# Altium PCB BRAWN.PcbDoc
Units mm, origin at the board's own origin, x right, y up, seen from the top; angles counter-clockwise.
Board outline 20 x 15 mm, 4 copper layers (Top Layer, Layer 1, Layer 2, Bottom Layer), stack 1.868 mm thick; 41 components, 25 nets, 140 pads, 112 vias.
Unrouted connection lines stored in the file: 7.
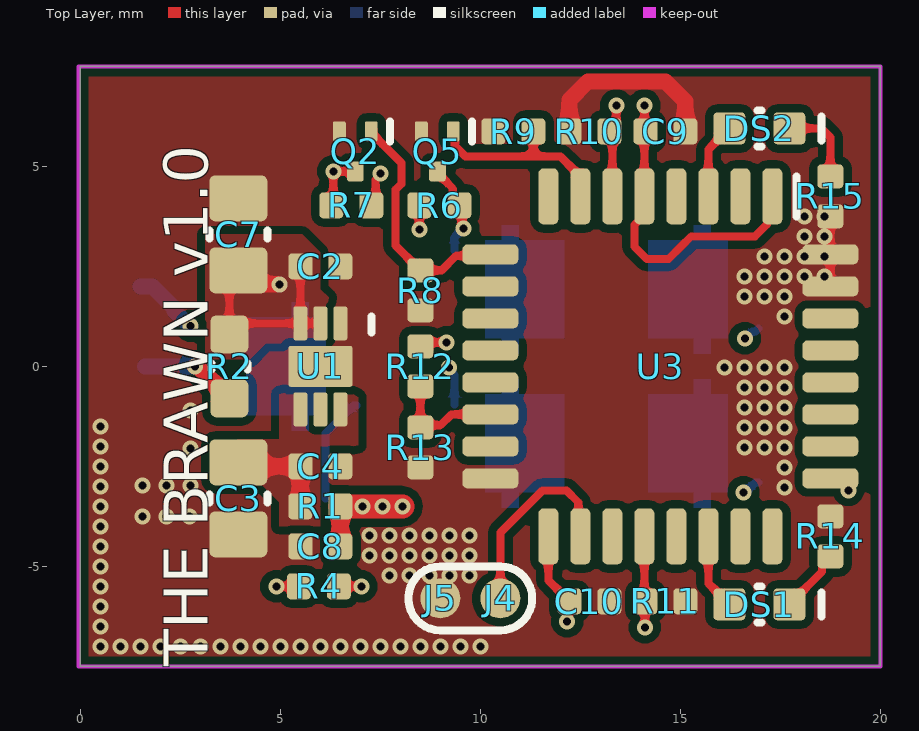
[diagram p0: Top Layer view]
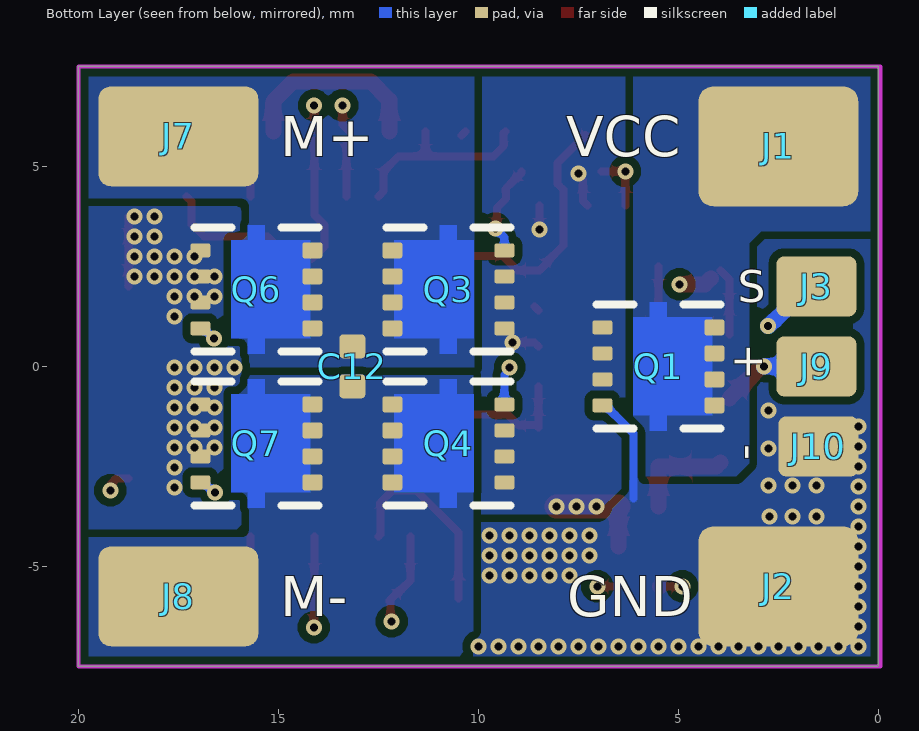
[diagram p1: Bottom Layer view, seen from below]
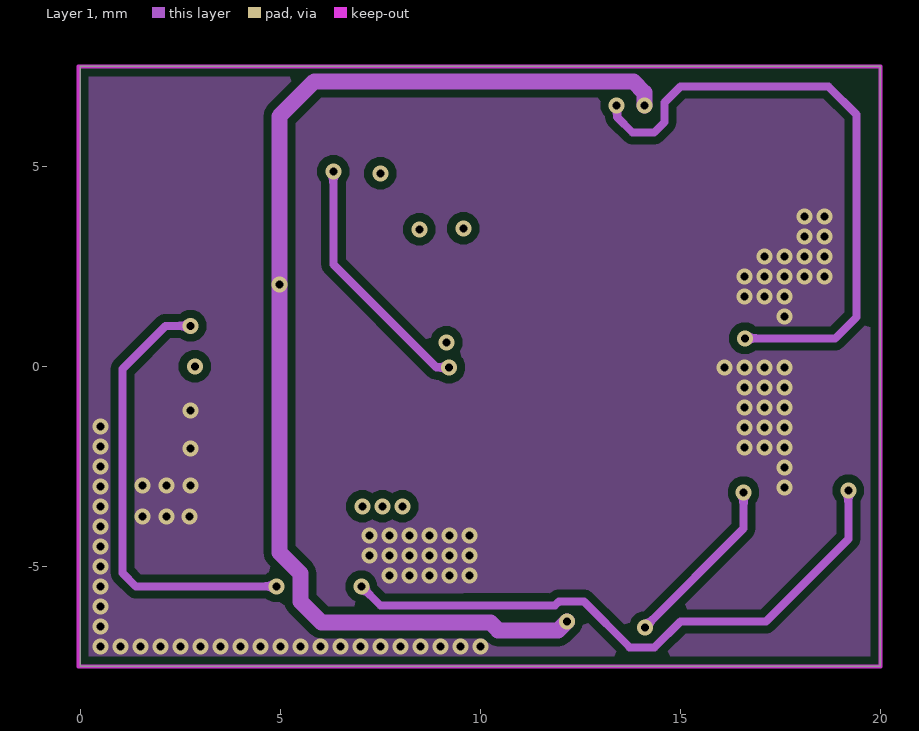
[diagram p2: Layer 1]
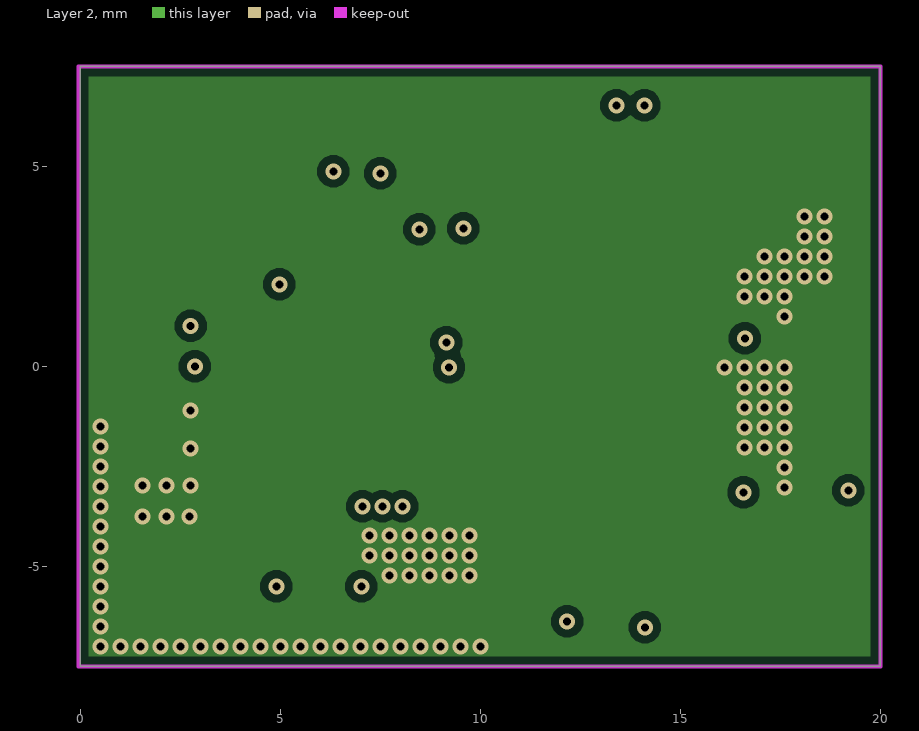
[diagram p3: Layer 2]
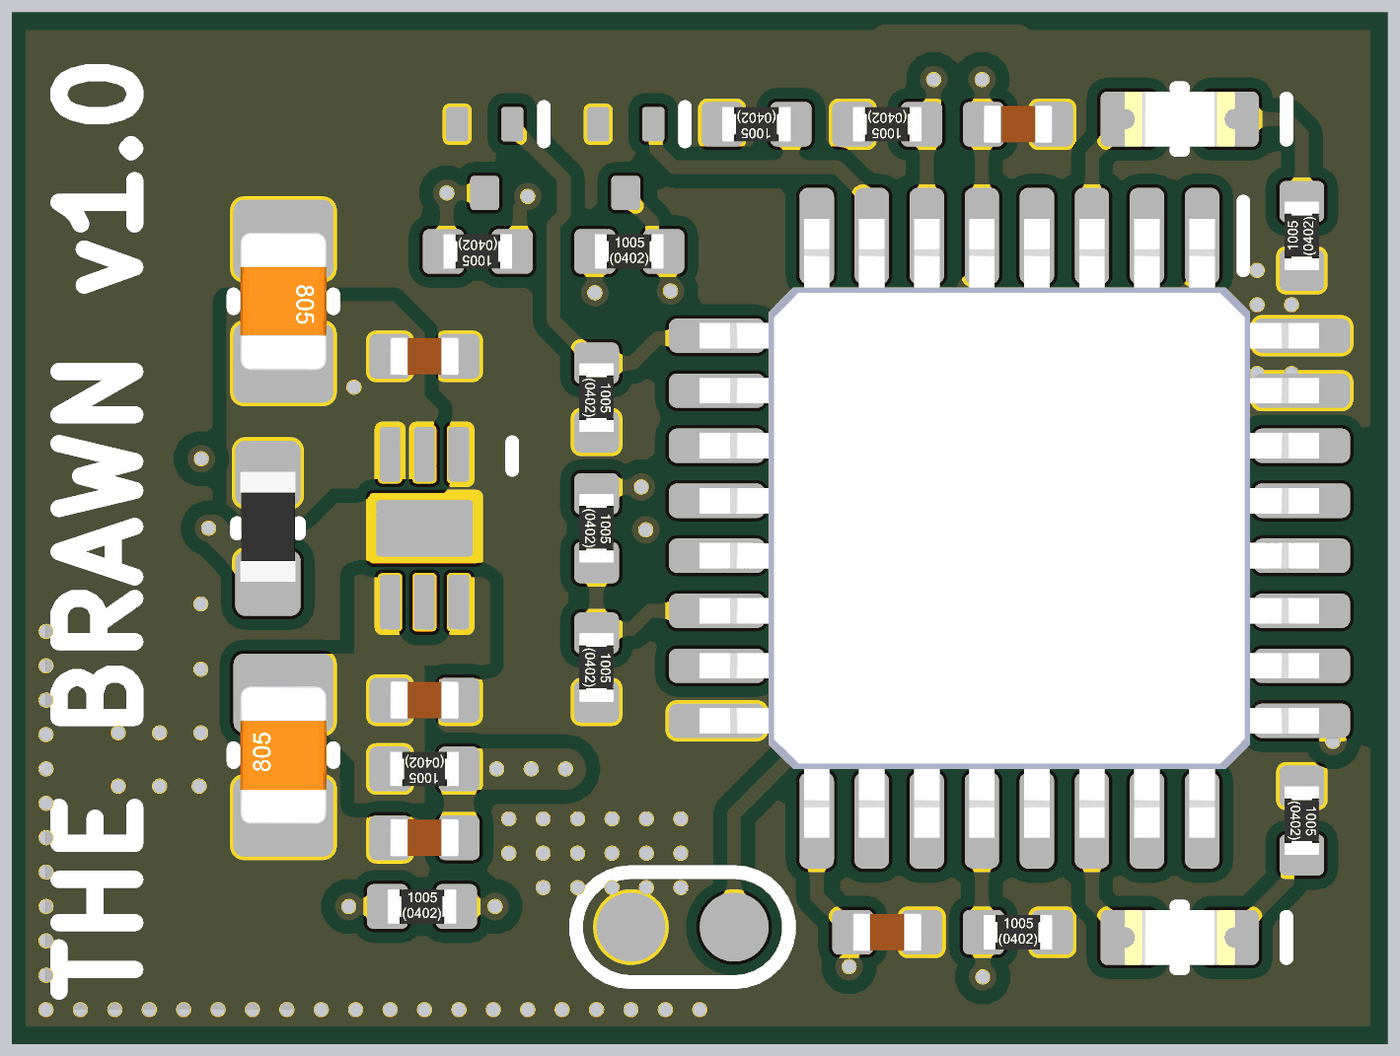
[diagram p4: 3D render of the assembled board from above, using the file's embedded part models]

## Layer stack, top to bottom
Top Solder: solder mask 0.0102, Solder Resist, Dk 3.5
Top Layer: signal copper 0.0356
Dielectric 1: core 0.1016, FR-4, Dk 4.5
Layer 1: signal copper 0.035
Dielectric1: core 1.524, FR-4, Dk 4.5
Layer 2: signal copper 0.035
Dielectric 2: core 0.1016, FR-4, Dk 4.5
Bottom Layer: signal copper 0.0356
Bottom Solder: solder mask 0.0102, Solder Resist, Dk 3.5

## Board outline
0,-7.5 0,7.5 20,7.5 20,-7.5

## Design rules (kind name [scope] priority, off if disabled: settings)
AcuteAngle [All] p1: minimum=6.00000000000000E+0001 checktracksonly=TRUE
AssemblyTestPointUsage [All] p1: valid=2
AssemblyTestpoint [All] p1: testpointundercomponent=FALSE minsize=1 maxsize=2.5 preferedsize=1.5 minholesize=0 maxholesize=1 preferedholesize=0.8 testpointgrid=0.1 usegrid=TRUE gridoriginx=100 gridoriginy=80 gridtolerance=0 allowsidebottom=TRUE minspacing=3
Clearance [All] p1: gap=0.199 ignorepadtopadclearanceinfootprint=FALSE except(0: Arc-Hole Track-Hole SMDPad-Hole THPad-Hole Via-Hole Fill-Hole Poly-Hole Region-Hole Text-Hole; 0.127: Arc-Arc Arc-Track Track-Track SMDPad-SMDPad Via-Via; 0.15: Arc-Text Track-Text SMDPad-Text THPad-Text Via-Text Fill-Text Poly-Text Region-Text Text-Text)
ComponentClearance [All] p1: gap=0.25 collisioncheckmode=3 verticalgap=0.25 showdistances=TRUE
DiffPairsRouting [All] p1: maxlimit=10 minlimit=0.2 mostfreqgap=0.254 toplayer_prefgap=0.2 toplayer_minwidth=0.381 toplayer_maxwidth=0.381 toplayer_prefwidth=0.381 midlayer1_mingap=0.254 midlayer1_maxgap=0.254 midlayer1_minwidth=0.381 midlayer1_maxwidth=0.381 midlayer1_prefwidth=0.381 midlayer2_mingap=0.254 midlayer2_maxgap=0.254 midlayer2_minwidth=0.381 midlayer2_maxwidth=0.381 midlayer2_prefwidth=0.381 bottomlayer_prefgap=0.2 bottomlayer_minwidth=0.381 bottomlayer_maxwidth=0.381 bottomlayer_prefwidth=0.381 maxuncoupledlength=5
FabricationTestPointUsage TestPointUsage [All] p1: valid=0 allowmultiple=FALSE
FabricationTestpoint Testpoint [All] p1: side=1 testpointundercomponent=TRUE minsize=0.3 maxsize=10 preferedsize=1.5 minholesize=0 maxholesize=10 preferedholesize=0.8 testpointgrid=0.025 allowsidetop=TRUE usegrid=FALSE gridtolerance=0
Height [All] p1: minheight=0 maxheight=100 prefheight=5
HoleSize HoleSize_1 [All] p1: absolutevalues=TRUE maxlimit=6.3 minlimit=0.2 maxpercent=80.000 minpercent=20.000
HoleToHoleClearance [IsVia] p1: gap=0.254 allowstackedmicrovias=TRUE
HoleToHoleClearance HoleToHoleClearance_1 [All] p2: gap=0.5 allowstackedmicrovias=TRUE
MatchedLengths DiffPair_GTMatchedLengths [InDifferentialPair ('GT_RX0') Or InDifferentialPair ('GT_RX1') Or InDifferentialPair ('GT_TX2') Or InDifferentialPair ('GT_TX3') Or InDifferentialPair ('GT_TX1') Or InDifferentialPair ('GT_RX2') Or InDifferentialPair ('GT_TX0') Or InDifferentialPair ('GT_RX3')] p1: tolerance=0.127 checknetsindiffpair=TRUE checkdiffpairvsdiffpair=FALSE checkxsignals=FALSE checkothers=FALSE
MinimumAnnularRing [All] p1: minimumring=0.1
MinimumSolderMaskSliver [All] p1: minsoldermaskwidth=0.15
PlaneClearance [All] p1: clearance=0.3
PlaneConnect PlaneConnect_Via [isVia] p1: planeconnectstyle=Direct reliefexpansion=0.508 reliefentries=4 reliefconductorwidth=0.254 reliefairgap=0.254
PlaneConnect [All] p2: planeconnectstyle=Direct reliefexpansion=0.3 reliefentries=4 reliefconductorwidth=0.3 reliefairgap=0.2
PolygonConnect PolygonConnect_Via [isVia] p1: connectstyle=Direct reliefconductorwidth=0.254 reliefentries=4 polygonreliefangle="90 Angle" airgapwidth=0.254
PolygonConnect [All] p2: connectstyle=Direct reliefconductorwidth=0.3 reliefentries=4 polygonreliefangle="90 Angle" airgapwidth=0.254
RoutingLayers [All] p1: top layer_v5=TRUE mid layer 1_v5=FALSE mid layer 2_v5=FALSE bottom layer_v5=TRUE
RoutingVias [All] p1: holewidth=0.3 width=0.7 viastyle="Through Hole" minholewidth=0.2 minwidth=0.4 maxholewidth=0.3 maxwidth=0.7
SilkToSilkClearance [All] p1: silktosilkclearance=0.1
SilkToSolderMaskClearance SilkscreenOverComponentPads [IsPad] p1: minsilkscreentomaskgap=0.125 clearancetoexposedcopper=TRUE
SolderMaskExpansion SolderMaskExpansion_Via [isvia] p1: expansion=-10 istentingtop=FALSE
SolderMaskExpansion [All] p2: expansion=0.05 istentingtop=FALSE
Width [All] p1: maxlimit=100 minlimit=0.127 preferedwidth=0.15 minimp=50.000000 maximp=50.000000 favimp=50.000000
15 further rules are at their usual default settings.

## Components (designator, comment, footprint, x,y, rotation, side; value= is the part's Value field where it differs from the comment)
C2 "100nF,50V" CAPC1005X05N_0402 6,2.5 r180 top
C3 "22uF, 16V" CAPC2012X12N_0805 3.95,-3.3 r90 top
C4 "100nF,50V" CAPC1005X05N_0402 6,-2.5 r180 top
C7 "22uF, 16V" CAPC2012X12N_0805 3.95,3.3 r270 top
C8 "100nF,50V" CAPC1005X05N_0402 6,-4.5 r0 top
C9 "100nF,50V" CAPC1005X05N_0402 14.625,5.875 r180 top locked
C10 "100nF,50V" CAPC1005X05N_0402 12.725,-5.875 r180 top
C12 "100nF,50V" CAPC1005X05N_0402 13.15,0 r90 bottom
DS1 "SML-LX0603IW-TR" LED_SML-LX0603 16.975,-5.95 r180 top locked
DS2 "SML-LX0603GW-TR" LED_SML-LX0603 16.975,5.95 r180 top locked
J1 "MountingPad(2x2)" MountingPad(2x2)#1 2.575,4.975 r180 bottom
J2 "MountingPad(2x2)" MountingPad(2x2)#2 2.5,-5 r180 bottom
J3 "MountingPad(2x2)" MountingPad(2x2)#3 1.5,2 r0 top
J4 "MountingPad(2x2)" MountingPad(2x2)#4 10.425,-5.85 r0 top
J5 "MountingPad(2x2)" MountingPad(2x2)#5 8.648,-5.95 r0 top
J7 "MountingPad(2x2)" MountingPad(2x2)#6 17.2,5.4 r90 bottom
J8 "MountingPad(2x2)" MountingPad(2x2)#7 17.425,-5.708 r90 bottom
J9 "MountingPad(2x2)" MountingPad(2x2)#8 1.612,0 r0 top locked
J10 "MountingPad(2x2)" MountingPad(2x2)#9 1.5,-1.975 r0 top
Q1 "AONR21321" DFN3X3A_8L_EP1_P 5.5,0 r180 bottom
Q2 "DMN2450" DFN3-125x125x53 6.875,5.375 r180 top
Q3 "AONR21321" DFN3X3A_8L_EP1_P 10.75,1.925 r0 bottom
Q4 "AONR21321" DFN3X3A_8L_EP1_P 10.75,-1.925 r0 bottom
Q5 "DMN2450" DFN3-125x125x53 8.925,5.375 r180 top
Q6 "AON7528" DFN3X3A_8L_EP1_P 15.55,1.925 r180 bottom
Q7 "AON7528" DFN3X3A_8L_EP1_P 15.55,-1.925 r180 bottom
R1 "0R,1%" RESC1005X04N_0402 6,-3.5 r180 top
R2 "0R,5%" RESC1608X06N_0603 3.725,0 r90 top
R4 "10K,1%" RESC1005X04N_0402 5.962,-5.5 r0 top
R6 "10K,1%" RESC1005X04N_0402 8.975,4.025 r0 top
R7 "10K,1%" RESC1005X04N_0402 6.775,4.025 r180 top
R8 "10K,1%" RESC1005X04N_0402 8.5,1.9 r270 top
R9 "10K,1%" RESC1005X04N_0402 10.825,5.875 r180 top
R10 "10K,1%" RESC1005X04N_0402 12.725,5.875 r180 top locked
R11 "10K,1%" RESC1005X04N_0402 14.625,-5.875 r0 top locked
R12 "10K,1%" RESC1005X04N_0402 8.5,0 r270 top
R13 "1k8,1%" RESC1005X04N_0402 8.5,-2.025 r270 top
R14 "120R,1%" RESC1005X04N_0402 18.75,-4.25 r270 top
R15 "120R,1%" RESC1005X04N_0402 18.75,4.25 r90 top
U1 "LDL212" DFN50P200X200X80-8N_PWSON6 6,0 r270 top
U3 "STM32L010" TSQFP50P700X700X160-32N 14.5,0 r270 top locked

## Footprints (in the part's own frame and the unit in brackets; to place one, negate y for a bottom-side part, rotate by r counter-clockwise, add the part's x,y. Pads: shape width x height; smd on the part's side, far side on the other; paste and mask are expansions set on the pad)
CAPC1005X05N_0402 [mm] "Chip Capacitor, 2-Leads, Body 1.0x0.5mm, IPC Medium Density"
  rrect33% 0.6x0.65 smd mask+0.05: 1(-0.5,0) 2(0.5,0)
  body extent -0.5,-0.28 0.5,0.27, height 0.5
CAPC2012X12N_0805 [mm] "Chip Capacitor, 2-Leads, Body 2.0x1.2mm, IPC Medium Density"
  rrect26% 1.15x1.45 smd: 1(-0.9,0) 2(0.9,0)
  silkscreen extent -0.1,-0.73 0.1,0.73, body extent -1,-0.62 1,0.63, height 0.78
DFN3-125x125x53 [mm] "MOSFET N CH 20V 0.9A 3DFN"
  rrect29% 0.32x0.5 smd mask+0.05: 1(-0.4,-0.5) 2(0.4,-0.5)
  rrect29% 0.42x0.5 smd mask+0.05: 3(0,0.5)
  silkscreen extent -0.86,-0.75 -0.86,-0.25, body extent -0.62,-0.62 0.62,0.62, height 0.9
DFN3X3A_8L_EP1_P [mm] "MOSFET N CH 60V 34.5A 8DFN"
  rrect29% 0.5x0.35 smd mask+0.05: 1(-1.4,0.975) 2(-1.4,0.325) 3(-1.4,-0.325) 4(-1.4,-0.975)
  rrect29% 0.5x0.4 smd mask+0.05: 5(1.4,-0.975) 6(1.4,-0.325) 7(1.4,0.325) 8(1.4,0.975)
  Top Layer region: -0.63,1.225 -0.215,1.225 -0.215,1.605 0.215,1.605 0.215,1.225 1.35,1.225 1.35,-1.225 0.215,-1.225 0.215,-1.605 -0.215,-1.605 -0.215,-1.225 -0.63,-1.225
  silkscreen extent -1.55,-1.55 1.55,1.55, body extent -1.55,-1.55 1.55,1.55, height 0.9
DFN50P200X200X80-8N_PWSON6 [mm] "DFN, 6-Leads, Body 2.1x2.1mm (max), Pitch 0.65mm, IPC Medium Density"
  rrect33% 0.85x0.35 smd paste-0.025: 1(-1.075,0.5) 2(-1.075,0) 3(-1.075,-0.5) 4(1.075,-0.5) 5(1.075,0) 6(1.075,0.5)
  rrect10% 1.02x1.6 smd paste-0.1: 7(0,0)
  silkscreen extent -1.25,1.28 -0.85,1.28, body extent -1.05,-1.05 1.05,1.05, height 0.8
LED_SML-LX0603 [mm] "Chip led, 2-Leads, Body 1.6x0.8mm, IPC Medium Density"
  rrect25% 0.8x0.8 smd: 1(-0.75,0) 2(0.75,0)
  silkscreen extent -1.55,-0.45 0.05,0.45, body extent -0.8,-0.4 0.8,0.4, height 0.63
MountingPad(2x2)#1 [mm]
  rrect25% 4x3 smd: 1(0.075,0.525)
MountingPad(2x2)#2 [mm]
  rrect25% 4x3 smd: 1(0,-0.5)
MountingPad(2x2)#3 [mm]
  rrect25% 2x1.5 smd far side: 1(0.05,0)
MountingPad(2x2)#4 [mm]
  round 1 smd: 1(0.075,0.05)
MountingPad(2x2)#5 [mm]
  round 1 smd: 1(0.352,0.15)
MountingPad(2x2)#6 [mm]
  rrect25% 2.5x4 smd: 1(0.35,0.3)
MountingPad(2x2)#7 [mm]
  rrect25% 2.5x4 smd: 1(-0.042,0.075)
MountingPad(2x2)#8 [mm]
  rrect25% 2x1.5 smd far side: 1(-0.062,0)
MountingPad(2x2)#9 [mm]
  rrect25% 2x1.5 smd far side: 1(0,-0.025)
RESC1005X04N_0402 [mm] "Chip Resistor, 2-Leads, Body 1.0x0.5mm, IPC Medium Density"
  rrect33% 0.6x0.65 smd mask+0.05: 1(-0.5,0) 2(0.5,0)
  body extent -0.5,-0.25 0.5,0.25, height 0.35
RESC1608X06N_0603 [mm] "Chip Resistor, 2-Leads, Body 1.6x0.8mm, IPC Medium Density"
  rrect32% 0.95x0.95 smd: 1(-0.8,0) 2(0.8,0)
  silkscreen extent -0.08,-0.45 0.08,0.45, body extent -0.78,-0.4 0.82,0.4, height 0.4
TSQFP50P700X700X160-32N [mm] "TSQFP, 32-Leads, Body 5.00x5.00mm, Pitch 0.50mm, IPC Medium Density"
  rrect50% 1.4x0.5 smd: 1(-4.25,2.8) 2(-4.25,2) 3(-4.25,1.2) 4(-4.25,0.4) 5(-4.25,-0.4) 6(-4.25,-1.2) 7(-4.25,-2) 8(-4.25,-2.8) 17(4.25,-2.8) 18(4.25,-2) 19(4.25,-1.2) 20(4.25,-0.4) 21(4.25,0.4) 22(4.25,1.2) 23(4.25,2) 24(4.25,2.8)
  rrect50% 0.5x1.4 smd: 9(-2.8,-4.25) 10(-2,-4.25) 11(-1.2,-4.25) 12(-0.4,-4.25) 13(0.4,-4.25) 14(1.2,-4.25) 15(2,-4.25) 16(2.8,-4.25) 25(2.8,4.25) 26(2,4.25) 27(1.2,4.25) 28(0.4,4.25) 29(-0.4,4.25) 30(-1.2,4.25) 31(-2,4.25) 32(-2.8,4.25)
  silkscreen extent -4.75,3.4 -3.75,3.4, body extent -4.5,-4.5 4.5,4.5, height 1.63

## Part data
C2 C4 C8 C9 C10 C12: library part CCG-104CE-G, "CAP CER 100nF 50V X7R 0402", Capacitance=100nF, Dielectric=X7R, Manufacturer="Taiyo Yuden", Manufacturer Part Number=UMK105B7104KV-FR, Supplier Part Number 1=587-3498-1-ND, Tolerance=10%, Voltage=50V, BWA PN=CCG-104CE-G, Display_Name=100nF,50V, Schematic Symbol=CAP-NP_1, Supplier 1=Digi-Key, Type=Ceramic
C3 C7: library part CCI-226DE-G, "CAP CER 22UF 16V X5R 0805", Capacitance=22uF, Dielectric=X5R, Manufacturer="Samsung Electro-Mechanics", Manufacturer Part Number=CL21A226KOQNNNE, Supplier Part Number 1=1276-6526-1-ND, Tolerance=10%, Voltage=16V, BWA PN=CCI-226DE-G, Display_Name="22uF, 16V", Schematic Symbol=CAP-NP_1, Supplier 1=Digi-Key, Type=Ceramic
DS1: library part LED-10056-A, "LED 635NM RED DIFF 0603 SMD", Colour=Red, Manufacturer="Lumex Opto/Components Inc", Supplier Part Number 1=67-1548-1-ND, Axial Intensity=14mcd, BWA PN=LED-10056-A, Display_Name=SML-LX0603IW-TR, If(max)=20mA, Lens Style/Size="Rectangle, 1mmx0.8mm", Lens type="Diffused, White", Manufacturer Part Number=SML-LX0603IW-TR, Schematic Symbol=LED_1, Supplier 1=Digi-Key, Vf@I=2V, Viewing Angle=160deg, Vr(max)=5V, Wavelength=635nm
DS2: library part LED-10011-A, "LED 565NM GRN DIFF 0603 SMD", Colour=Green, Manufacturer="Lumex Opto/Components Inc", Supplier Part Number 1=67-1549-1-ND, Axial Intensity=18mcd, BWA PN=LED-10011-A, Display_Name=SML-LX0603GW-TR, If(max)=25mA, Lens Style/Size="Rectangle, 1mmx0.8mm", Lens type="Diffused, White", Manufacturer Part Number=SML-LX0603GW-TR, Schematic Symbol=LED_1, Supplier 1=Digi-Key, Vf@I=2.2V, Viewing Angle=160deg, Vr(max)=5V, Wavelength=565nm
Q1 Q3 Q4: library part TRN-10126-A, "P-Channel 30 V 24A (Tc) 4.1W (Ta), 24W (Tc) Surface Mount 8-DFN-EP (3x3)", Manufacturer="Alpha & Omega Semiconductor Inc.", Supplier Part Number 1=785-1797-1-ND, BWA PN=TRN-10126-A, Display_Name=AONR21321, Id(max)=24A, Manufacturer Part Number=AONR21321, rds(on)="16.5mOhm @ 12A, 10V", Schematic Symbol=MOSFET-P_5, Supplier 1=Digi-Key, Type=P, Vds(max)=30V, Vgs(max)=±25V, Vth(max)="2.3V @ 250µA"
Q2 Q5: library part TRN-10128-P, "MOSFET N-CH 20V 900MA 3DFN", Manufacturer="Diodes Incorporated", Manufacturer Part Number=DMN2450UFD-7, Supplier Part Number 1=DMN2450UFD-7DICT-ND, BWA PN=TRN-10128-P, Display_Name=DMN2450, Id(max)=900mA, rds(on)="600mOhm @ 200mA, 4.5V", Schematic Symbol=MOSFET-N_1, Supplier 1=Digi-Key, Type=N, Vds(max)=20V, Vgs(max)=±12V, Vth(max)="1V @ 250µA"
Q6 Q7: library part TRN-10127-A, "MOSFET N-CH 30V 45A/50A 8DFN", Manufacturer="Alpha & Omega Semiconductor Inc.", Supplier Part Number 1=785-1506-1-ND, BWA PN=TRN-10127-A, Display_Name=AON7528, Id(max)=40A, Manufacturer Part Number=AON7528, rds(on)="2mOhm @ 20A, 10V", Schematic Symbol=MOSFET-N_5, Supplier 1=Digi-Key, Type=N, Vds(max)=30V, Vgs(max)=±20V, Vth(max)="2.2V @ 250µA"
R1: library part RSG-0R000-F, "RES 0R OHM 1/16W 5% 0402 SMD", Manufacturer=Yageo, Manufacturer Part Number=RC0402JR-070RL, Power=0.0625W, Resistance=0R, Supplier Part Number 1=311-0.0JRCT-ND, Tolerance=5%, BWA PN=RSG-0R000-F, Display_Name=0R,1%, Schematic Symbol=RESISTOR_1, Supplier 1=Digi-Key, Type=Chip
R2: library part RSH-0R000-F, "RES 0.0 OHM 1/10W 0603 SMD", Manufacturer=Yageo, Manufacturer Part Number=RC0603JR-070RL, Power=0.1W, Resistance=0R, Supplier Part Number 1=311-0.0GRCT-ND, Tolerance=5%, BWA PN=RSH-0R000-F, Display_Name=0R,5%, Schematic Symbol=RESISTOR_1, Supplier 1=Digi-Key, Type=Chip
R4 R6 R7 R8 R9 R10 R11 R12: library part RSG-10K00-D, "RES 10K OHM 1/16W 1% 0402 SMD", Manufacturer=Yageo, Manufacturer Part Number=RC0402FR-0710KL, Power=0.0625W, Resistance=10K, Supplier Part Number 1=311-10.0KLRCT-ND, Tolerance=1%, BWA PN=RSG-10K00-D, Display_Name=10K,1%, Schematic Symbol=RESISTOR_1, Supplier 1=Digi-Key, Type=Chip
R13: library part RSG-1K800-D, "RES 1k8 0.0625W 1% 0402 SMD", Manufacturer="Vishay Dale", Manufacturer Part Number=CRCW04021K80FKED, Power=0.0625W, Resistance=1k8, Supplier Part Number 1=541-1.80KLCT-ND, Tolerance=1%, BWA PN=RSG-1K800-D, Display_Name=1k8,1%, Schematic Symbol=RESISTOR_1, Supplier 1=Digi-Key, Type=Chip
R14 R15: library part RSG-120R0-D, "RES 120 OHM 1/16W 0402 SMD", Manufacturer=Yageo, Manufacturer Part Number=RC0402FR-07120RL, Power=0.0625W, Resistance=120R, Supplier Part Number 1=311-120LRCT-ND, Tolerance=1%, BWA PN=RSG-120R0-D, Display_Name=120R,1%, Schematic Symbol=RESISTOR_1, Supplier 1=Digi-Key, Type=Chip
U1: library part ICT-10916-A, "1.2A 3V3 LDO LINEAR REGULATOR", Manufacturer=STMicroelectronics, Manufacturer Part Number=LDL212PV33R, Supplier Part Number 1=497-19548-1-ND, Temp Range="-40°C ~ 125°C (TJ)", BWA PN=ICT-10916-A, Display_Name=LDL212, Schematic Symbol=LDL212PU50R, Supplier 1=Digi-Key
U3: library part ICT-10946-A, "ARM® Cortex®-M0+ series Microcontroller IC 32-Bit 32MHz 16KB (16K x 8) FLASH 32-LQFP (7x7)", Manufacturer=STMicroelectronics, Manufacturer Part Number=STM32L010K4T6, Supplier Part Number 1=497-STM32L010K4T6-ND, Temp Range="-40°C ~ 85°C (TA)", BWA PN=ICT-10946-A, Display_Name=STM32L010, Schematic Symbol=STM32L010F4/K4, Supplier 1=Digi-Key

## Via types
v1: diameter 0.4, hole 0.2, Top Layer to Bottom Layer, tented both sides, 112 vias

## Nets (pads, with @x,y where several pads share a name; then routed paths per layer and width w, separated by ;. In a path a pad name is that pad's centre, name@x,y a point inside that pad or via, vN(x,y) a via of type N, cw(c..) or ccw(c..) an arc to the next point about the centre after c; other vN are vias at no path point)
+3V3: C2.2 C7.2 C9.2 C10.2 R2.2 U1.2 U1.3 U3.1 U3.5 U3.17 | length 45.8
  Top Layer w0.2: R2.2 3.725,2.175 C7.2 ; R2.2@4,1.075 U1.3 ; v1(4.975,2.05) v1@5.013,2.088 ; C2.2@5.5,2.475 C2.2 U1.3 ; U1.2 U1.3 ; U3.17 11.7,-5.35 12,-5.65 12.025,-5.65 C10.2@12.225,-5.85 ; v1(12.17,-6.375) 12.197,-6.347 12.197,-5.878 C10.2@12.225,-5.85 ; C10.2 C10.2@12.225,-5.85 ; v1@14.103,6.524 14.103,5.922 C9.2@14.125,5.9 ; C9.2@14.125,5.65 14.1,5.625 14.1,3.786 13.849,3.535 13.849,2.995 14.165,2.678 14.699,2.678 15.014,2.993 15.016,2.993 15.273,3.251 16.864,3.251 17.165,3.552 17.165,4.115 U3.1
  Top Layer w0.4: C7.2@4.185,2.2 4.335,2.05 v1(4.975,2.05)
  Layer 1 w0.4: v1(12.17,-6.375) 11.945,-6.6 10.447,-6.6 10.248,-6.401 9.752,-6.401 6.026,-6.401 5.499,-5.874 5.499,-5.174 4.975,-4.65 v1(4.975,2.05) 4.975,6.25 5.848,7.123 13.824,7.123 14.103,6.844 v1(14.103,6.524)
BAT_DET: R12.2 R13.1 U3.14 | length 2.9
  Top Layer w0.2: R12.2 R13.1 8.558,-1.467 9.008,-1.467 9.275,-1.2 U3.14
CALIBRATE: J4.1 U3.18 | length 5
  Top Layer w0.2: J4.1 10.5,-4.15 11.55,-3.1 12.15,-3.1 12.449,-3.399 12.449,-4.199 U3.18
GND: C2.1 C3.1 C4.1 C7.1 C8.1 C9.1 C10.1 J2.1 J5.1 J10.1 Q1.4 Q2.2 Q5.2 Q6.1 Q6.2 Q6.3 Q7.1 Q7.2 Q7.3 R8.2 R9.2 R10.2 R11.2 R13.2 R14.1 R15.1 U1.1 U1.7 U3.16 U3.31 U3.32 | length 9.6
  Top Layer w0.2: R8.2 R8.2@8.6,1.5 ; R9.2 R9.2@10.425,5.775 ; U3.31 U3.32 R15.1
  Top Layer w0.4: R10.2 12.225,6.657 12.691,7.123 14.627,7.123 15.125,6.625 C9.1
  Bottom Layer w0.2: 6.125,-3.3 6.125,-1.675 6.825,-0.975 Q1.4
  other v1: 0.5,-7 1,-7 1.5,-7 2,-7 2.5,-7 3,-7 3.5,-7 4,-7 4.5,-7 5,-7 5.5,-7 6,-7 6.5,-7 7,-7 7.5,-7 8,-7 8.5,-7 9,-7 9.5,-7 10,-7 0.5,-6.5 0.5,-6 0.5,-5.5 7.725,-5.225 8.225,-5.225 8.725,-5.225 9.225,-5.225 9.725,-5.225 0.5,-5 7.225,-4.725 7.725,-4.725 8.225,-4.725 8.725,-4.725 9.225,-4.725 9.725,-4.725 0.5,-4.5 7.225,-4.225 7.725,-4.225 8.225,-4.225 8.725,-4.225 9.225,-4.225 9.725,-4.225 0.5,-4 1.55,-3.75 2.15,-3.75 2.725,-3.75 0.5,-3.5 17.6,-3.025 0.5,-3 1.55,-2.975 2.15,-2.975 2.75,-2.975 17.6,-2.525 0.5,-2.5 2.75,-2.05 16.6,-2.025 17.1,-2.025 17.6,-2.025 0.5,-2 16.6,-1.525 17.1,-1.525 17.6,-1.525 0.5,-1.5 2.75,-1.1 16.6,-1.025 17.1,-1.025 17.6,-1.025 16.6,-0.525 17.1,-0.525 17.6,-0.525 16.1,-0.025 16.6,-0.025 17.1,-0.025 17.6,-0.025 17.6,1.25 16.6,1.75 17.1,1.75 17.6,1.75 16.6,2.25 17.1,2.25 17.6,2.25 18.1,2.25 18.6,2.25 17.1,2.75 17.6,2.75 18.1,2.75 18.6,2.75 18.1,3.25 18.6,3.25 18.1,3.75 18.6,3.75
L_MOTOR+: C12.2 J7.1 Q3.5 Q3.6 Q3.7 Q3.8 Q6.5 Q6.6 Q6.7 Q6.8
L_MOTOR-: C12.1 J8.1 Q4.5 Q4.6 Q4.7 Q4.8 Q7.5 Q7.6 Q7.7 Q7.8
LED_GREEN: DS2.2 U3.3 | length 1.9
  Top Layer w0.2: U3.3 15.7,5.425 DS2.2
LED_RED: DS1.2 U3.22 | length 1.9
  Top Layer w0.2: U3.22 15.7,-5.425 DS1.2
N1: Q6.4 R10.1 U3.6 | length 18.2
  Top Layer w0.2: R10.1@13.225,5.65 13.3,5.575 U3.6 ; R10.1 13.4,6.05 v1(13.4,6.524)
  Layer 1 w0.2: v1(13.4,6.524) 13.417,6.507 13.417,6.233 13.808,5.842 14.339,5.842 14.602,6.104 14.602,6.6 15.002,7 18.699,7 19.4,6.299 19.4,1.228 18.872,0.7 v1(16.613,0.7)
  Bottom Layer w0.2: v1(16.613,0.7) 16.625,0.7 16.8,0.875 16.875,0.875 Q6.4
N2: Q7.4 R11.1 U3.20 | length 7.1
  Top Layer w0.2: U3.20 14.1,-5.85 R11.1 ; v1(14.112,-6.524) R11.1@14.113,-5.888
  Layer 1 w0.2: v1(14.112,-6.524) 16.579,-4.058 v1@16.579,-3.164
  Bottom Layer w0.2: v1(16.579,-3.151) 16.624,-3.151 16.875,-2.9 Q7.4
NetC3_2: C3.2 C4.2 R1.2 U1.4 U1.6 | length 2.6
  Top Layer w0.4: C3.2 4.05,-2.5 C4.2 R1.2
NetDS1_1: DS1.1 R14.2 | length 1.6
  Top Layer w0.2: DS1.1 18.542,-5.133 18.542,-4.95 18.742,-4.75 R14.2
NetDS2_1: DS2.1 R15.2 | length 2.1
  Top Layer w0.2: DS2.1 18.525,5.95 18.75,5.725 R15.2
NetJ1_1: J1.1 Q1.5 Q1.6 Q1.7 Q1.8
NetJ3_1: J3.1 R4.1 | length 13.5
  Top Layer w0.2: v1(4.9,-5.5) R4.1
  Layer 1 w0.2: v1(2.757,1.011) 2.127,1.011 1.051,-0.065 1.051,-5.166 1.386,-5.5 v1(4.9,-5.5)
  Bottom Layer w0.4: J3.1@1.5,2 1.8,2 2.35,1.45 2.35,1.383 2.584,1.149 2.605,1.149 2.744,1.011 v1(2.757,1.011)
NetJ9_1: J9.1 R2.1 | length 2.4
  Top Layer w0.4: v1(2.862,0) 2.925,0 R2.1
  Bottom Layer w0.4: J9.1@1.612,0 v1(2.862,0)
NRST: U3.4
P1: Q5.1 R9.1 U3.7 | length 5
  Top Layer w0.2: Q5.1 9.366,5.834 9.366,5.509 9.626,5.249 11.325,5.249 ; R9.1 11.325,5.249 ; U3.7 12.365,4.385 12.365,4.884 12.001,5.249 11.325,5.249
P1-I: Q3.4 Q5.3 R6.2 | length 2.3
  Top Layer w0.2: Q5.3 8.925,4.835 9.31,4.45 9.31,4.19 9.537,3.963 9.537,3.488 v1(9.575,3.45)
  Bottom Layer w0.2: Q3.4 Q3.4 9.349,3.224 v1(9.575,3.45)
P2: Q2.1 R8.1 U3.9 | length 5.9
  Top Layer w0.2: Q2.1@7.325,5.785 8.025,5.085 8.025,4.565 7.876,4.416 7.876,3.024 8.275,2.625 8.275,2.6 8.475,2.4 9.025,2.4 9.387,2.762 10.212,2.762 U3.9
P2-I: Q2.3 Q4.4 R7.2 | length 8.7
  Top Layer w0.2: R7.2@6.325,4.025 v1(6.325,4.875) Q2.3@6.925,4.875
  Layer 1 w0.2: v1(6.325,4.875) 6.325,2.55 8.903,-0.028 9.21,-0.028 v1(9.216,-0.023)
  Bottom Layer w0.2: v1(9.216,-0.023) 9.216,-0.077 9.35,-0.211 Q4.4
RADIO: R4.2 U3.25 | length 16.5
  Top Layer w0.2: R4.2 v1(7.025,-5.5) ; U3.25 19.052,-2.8 19.2,-2.948 v1(19.2,-3.1)
  Layer 1 w0.2: v1(7.025,-5.5) 7.499,-5.974 9.575,-5.974 11.865,-5.974 11.963,-5.876 12.588,-5.876 13.735,-7.023 14.356,-7.023 15.004,-6.375 17.141,-6.375 19.2,-4.316 v1(19.2,-3.1)
SWCLK: U3.24
SWDIO: U3.23
VCC: C8.2 Q1.1 Q1.2 Q1.3 Q3.1 Q3.2 Q3.3 Q4.1 Q4.2 Q4.3 R1.1 R6.1 R7.1 R12.1 | length 4.7
  Top Layer w0.2: R7.1 7.384,4.134 7.384,4.655 7.5,4.771 v1(7.5,4.825) ; v1(8.475,3.425) R6.1 ; R12.1 8.601,0.601 v1@9.149,0.601
  Top Layer w0.4: C8.2 R1.1
  Top Layer w0.6: R1.1 v1(7.05,-3.5) v1(7.55,-3.5) v1(8.05,-3.5)
  other v1: 9.15,0.6
pads on no net: U1.5 U3.2 U3.8 U3.10 U3.11 U3.12 U3.13 U3.15 U3.19 U3.21 U3.26 U3.27 U3.28 U3.29 U3.30
copper on no net: | length 0
  Top Layer w0.2: 10.25,-2 10.276,-2.026

## Polygon pours and split planes (outlines as drawn)
GND on Bottom Layer "NONET_L-01_P-001" (solid, remove dead copper, pour order 1): 20,3.995 19.995,4 15.925,4 15.925,-4.075 20,-4.075
NetJ1_1 on Bottom Layer "NONET_L-01_P-001" (solid, remove dead copper, pour order 0): 0,7.5 0,3.375 2.925,3.375 3.225,3.075 3.225,-2.425 3.55,-2.75 6.125,-2.75 6.125,7.5
GND on Bottom Layer "NONET_L-01_P-001" (solid, remove dead copper, pour order 6): 10.125,-7.5 10.125,-3.788 10.037,-3.7 7.05,-3.7 7.05,-3.675 6.125,-2.75 3.55,-2.75 3.225,-2.425 3.225,3.375 0,3.375 0,-7.5
VCC on Bottom Layer "NONET_L-01_P-001" (solid, remove dead copper, pour order 4): 6.125,7.5 10.1,7.5 10.1,-3.762 10.037,-3.7 7.05,-3.7 7.05,-3.675 6.125,-2.75
L_MOTOR- on Bottom Layer "NONET_L-01_P-001" (solid, remove dead copper, pour order 3): 20,-7.5 20,-4.005 19.995,-4 16.175,-4 16.175,-0.025 10.125,-0.025 10.125,-7.5
L_MOTOR+ on Bottom Layer "NONET_L-01_P-001" (solid, remove dead copper, pour order 2): 20,7.5 20,4.005 19.995,4 16.175,4 16.175,-0.025 10.1,-0.025 10.1,7.5
GND on Top Layer "NONET_L-01_P-001" (solid, remove dead copper, pour order 10): 0,7.5 20,7.5 20,-7.5 0,-7.5
+3V3 on Top Layer "NONET_L-01_P-001" (solid, remove dead copper, pour order 9): 6.275,0.575 4.643,0.575 4.243,0.175 3.125,0.175 3.125,3.3 5.55,3.3 6,2.85 6,1.932 6.282,1.65
NetC3_2 on Top Layer "NONET_L-01_P-001" (solid, remove dead copper, pour order 7): 6,-4 6,-2 6.95,-2 6.95,-0.65 4.975,-0.65 4.975,-1.825 3.925,-1.825 3.925,-2.975 4.55,-2.975 4.975,-3.4 4.975,-4
GND on Layer 1 "NONET_L-01_P-001" (solid, remove dead copper, pour order 12): 0,7.5 20,7.5 20,-7.5 0,-7.5
GND on Layer 2 "NONET_L-01_P-001" (solid, remove dead copper, pour order 11): 0,7.5 20,7.5 20,-7.5 0,-7.5

## Keep-outs
Keep-Out Layer:
  lines w0.1: -0.05,-7.5 20,-7.5 20,7.5 -0.05,7.5 -0.05,-7.5

## Silkscreen, mask and mechanical layers (free items; w line width, h text height)
Top Overlay:
  lines w0.2: 9,-6.6 cw(c9,-5.8) 9,-5 10.5,-5 cw(c10.5,-5.8) 10.5,-6.6 9,-6.6
  text "THE BRAWN v1.0" at 3.191,-7.5 h1.1 r90
Bottom Overlay:
  text "VCC" at 7.8,5.25 h1
  text "M+" at 14.952,5.25 h1
  text "S" at 3.517,1.6 h0.8
  text "+" at 3.593,-0.343 h0.8 r90
  text "-" at 3.593,-2.343 h0.8 r90
  text "GND" at 7.776,-6.25 h1
  text "M-" at 14.952,-6.25 h1
Misc:
  lines w0.1: 0,2.42 7.65,2.42 ; 0,4.94 5.1,4.94 5.1,13 7.6,13 7.6,2.42
Sheet Format, Top:
  drawing of 836 lines, arcs and shapes, not listed
  text "1" at -61.607,102.745 h1.85
  text "2" at -12.023,102.745 h1.85
  text "3" at 37.977,102.745 h1.85
  text "4" at 87.977,102.745 h1.85
  text "5" at 137.977,102.745 h1.85
  text "6" at 187.977,102.745 h1.85
  text "7" at 237.977,102.745 h1.85
  text "8" at 287.977,102.745 h1.85
  text "A" at -89.523,86.745 h1.85
  text "A" at 315.477,86.745 h1.85
  text "B" at -89.523,36.745 h1.85
  text "B" at 315.477,36.745 h1.85
  text "C" at -89.523,-13.255 h1.85
  text "C" at 315.477,-13.255 h1.85
  text "D" at -89.523,-63.255 h1.85
  text "D" at 315.477,-63.255 h1.85
  text "E" at -89.523,-113.255 h1.85
  text "E" at 315.477,-113.255 h1.85
  text ".VariantName" at 256.66,-143.804 h2.54
  text "Project" at 195.7,-144.002 h2.54
  text "Variant" at 249.04,-144.002 h2.54
  text ".Project_Description" at 204.59,-144.876 h3.5
  text ".Project_Revision" at 256.66,-150.154 h2.54
  text "Sheet" at 195.7,-150.352 h2.54
  text "Revision" at 249.04,-150.352 h2.54
  text ".Printout_Name" at 204.59,-151.226 h3.5
  text "Design" at 195.7,-155.432 h2.54
  text ".Project_DesignBy" at 207.13,-155.432 h2.54
  text "Checking" at 233.8,-155.432 h2.54
  text ".Project_CheckingBy" at 245.23,-155.432 h2.54
  text "Drafting" at 195.7,-157.972 h2.54
  text ".Project_DraftingBy" at 207.13,-157.972 h2.54
  text "Components" at 233.8,-157.972 h2.54
  text ".Project_ComponentsBy" at 245.23,-157.972 h2.54
  text "Layout" at 195.7,-160.512 h2.54
  text ".Project_LayoutBy" at 207.13,-160.512 h2.54
  text ".Project_Address1" at 273.17,-160.512 h2.54
  text ".Project_Phone" at 295.869,-160.54 h2.54
  text ".Project_Address2" at 273.17,-163.052 h2.54
  text ".Project_Fax" at 295.869,-163.115 h2.54
  text "F" at -89.523,-163.255 h1.85
  text "F" at 315.477,-163.255 h1.85
  text "A3" at 245.23,-164.124 h2.54
  text "Routing" at 195.7,-164.322 h2.54
  text "MECHANICAL LAYER 2" at 207.13,-164.322 h2.54
  text "Size" at 233.8,-164.322 h2.54
  text ".Project_Address3" at 273.17,-165.592 h2.54
  text ".Project_Address4" at 273.17,-168.132 h2.54
  text "Date" at 195.7,-169.402 h2.54
  text ".Print_Date" at 207.13,-169.402 h2.54
  text "Time" at 233.8,-169.402 h2.54
  text ".Print_Time" at 245.23,-169.402 h2.54
  text ".Project_Address5" at 273.17,-170.672 h2.54
  text ".Project_URL" at 273.17,-173.212 h2.54
  text "File" at 195.7,-174.482 h2.54
  text ".Pcb_File_Name" at 207.13,-174.482 h2.54
  text "1" at -61.607,-179.255 h1.85
  text "2" at -12.023,-179.255 h1.85
  text "3" at 37.977,-179.255 h1.85
  text "4" at 87.977,-179.255 h1.85
  text "5" at 137.977,-179.255 h1.85
  text "6" at 187.977,-179.255 h1.85
  text "7" at 237.977,-179.255 h1.85
  text "8" at 287.977,-179.255 h1.85